# Altium PCB DS131-1.0-BpH传感器.PcbDoc
Units mm, origin at the board's own origin, x right, y up, seen from the top; angles counter-clockwise.
Board outline 41 x 64 mm, 2 copper layers (Top Layer, Bottom Layer), stack 1.671 mm thick; 30 components, 36 nets, 109 pads, 81 vias.
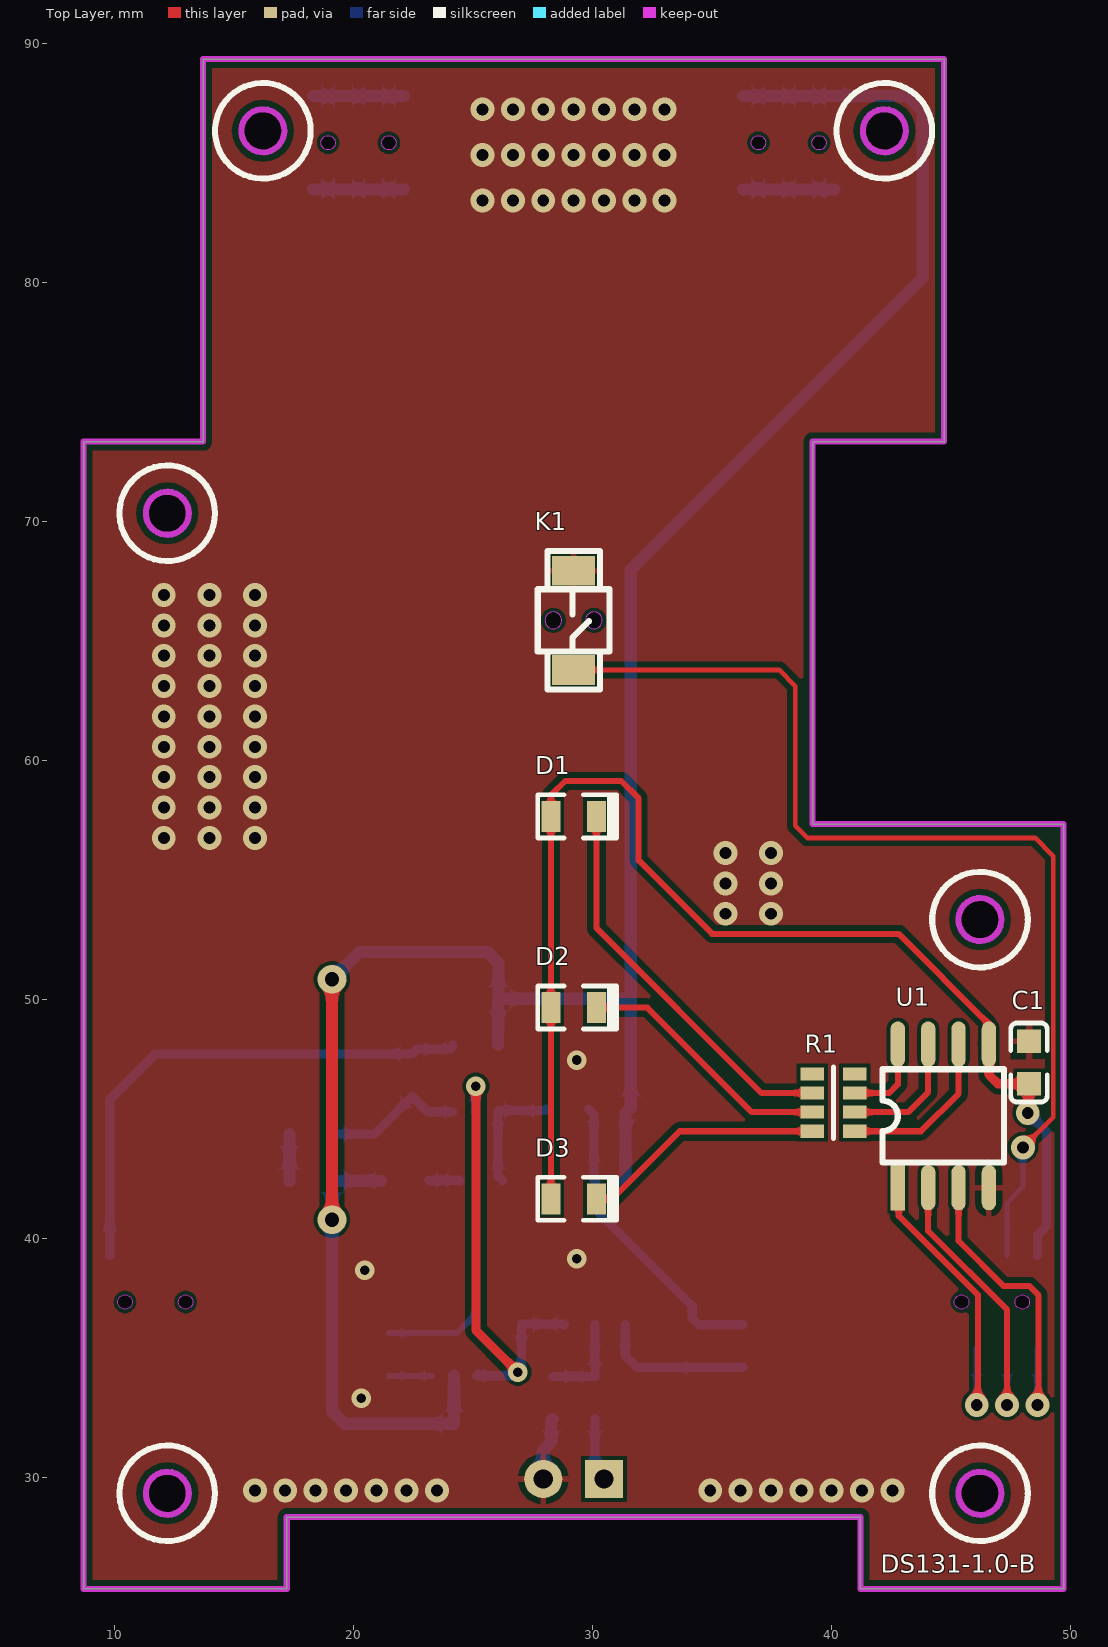
[diagram p0: Top Layer view]
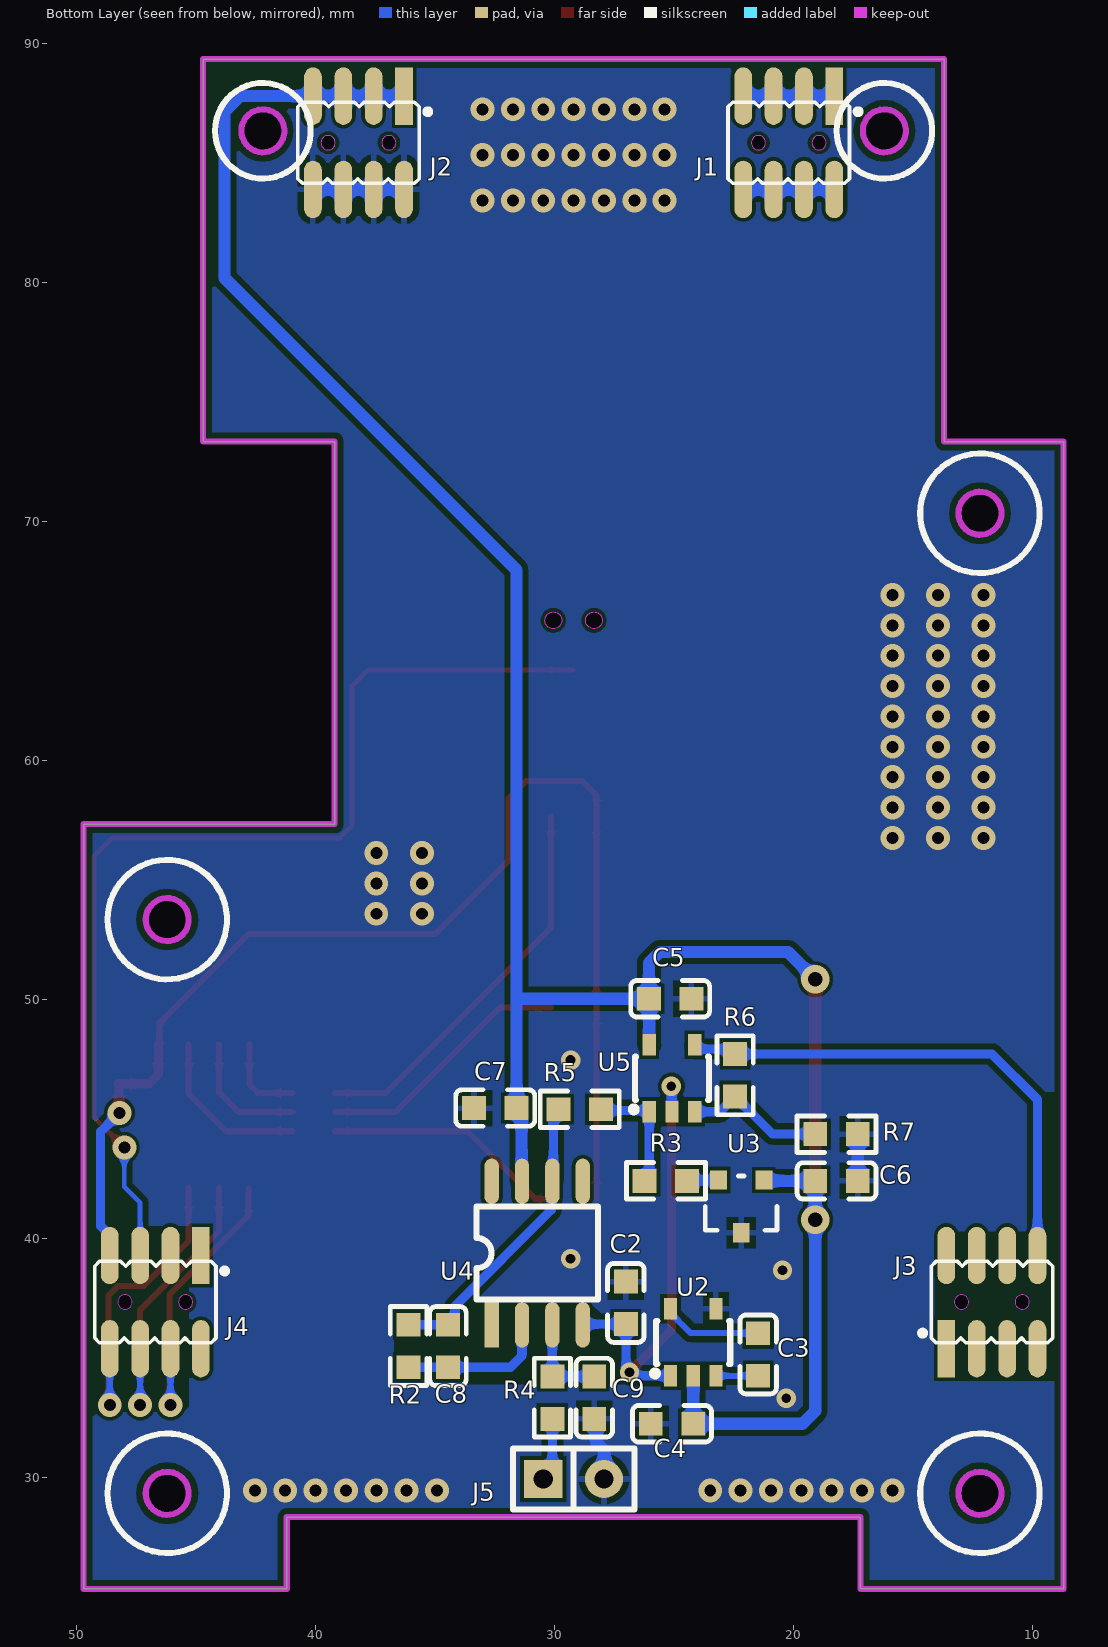
[diagram p1: Bottom Layer view, seen from below]
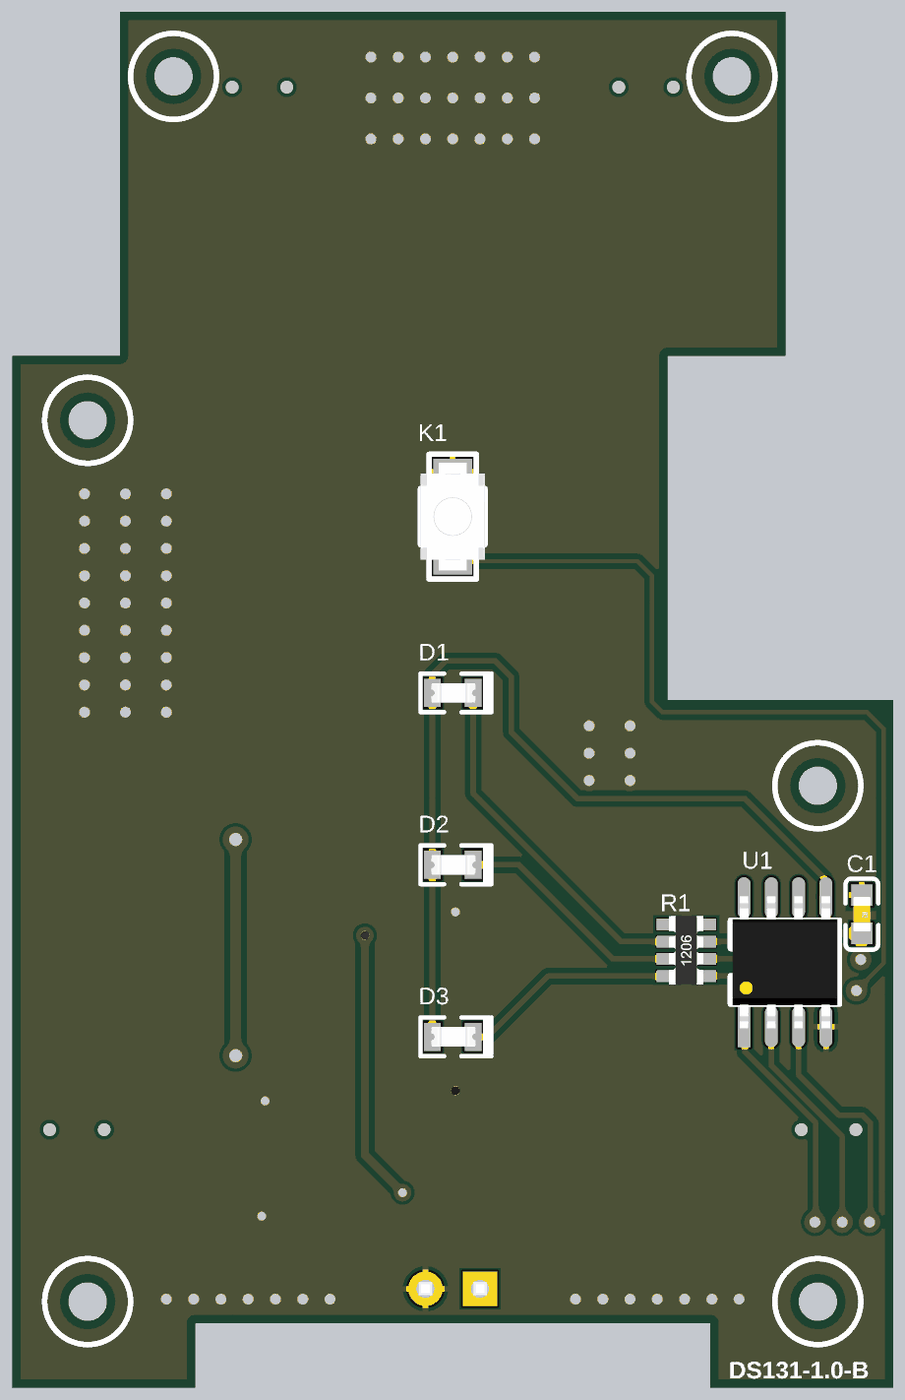
[diagram p2: 3D render of the assembled board from above, using the file's embedded part models]
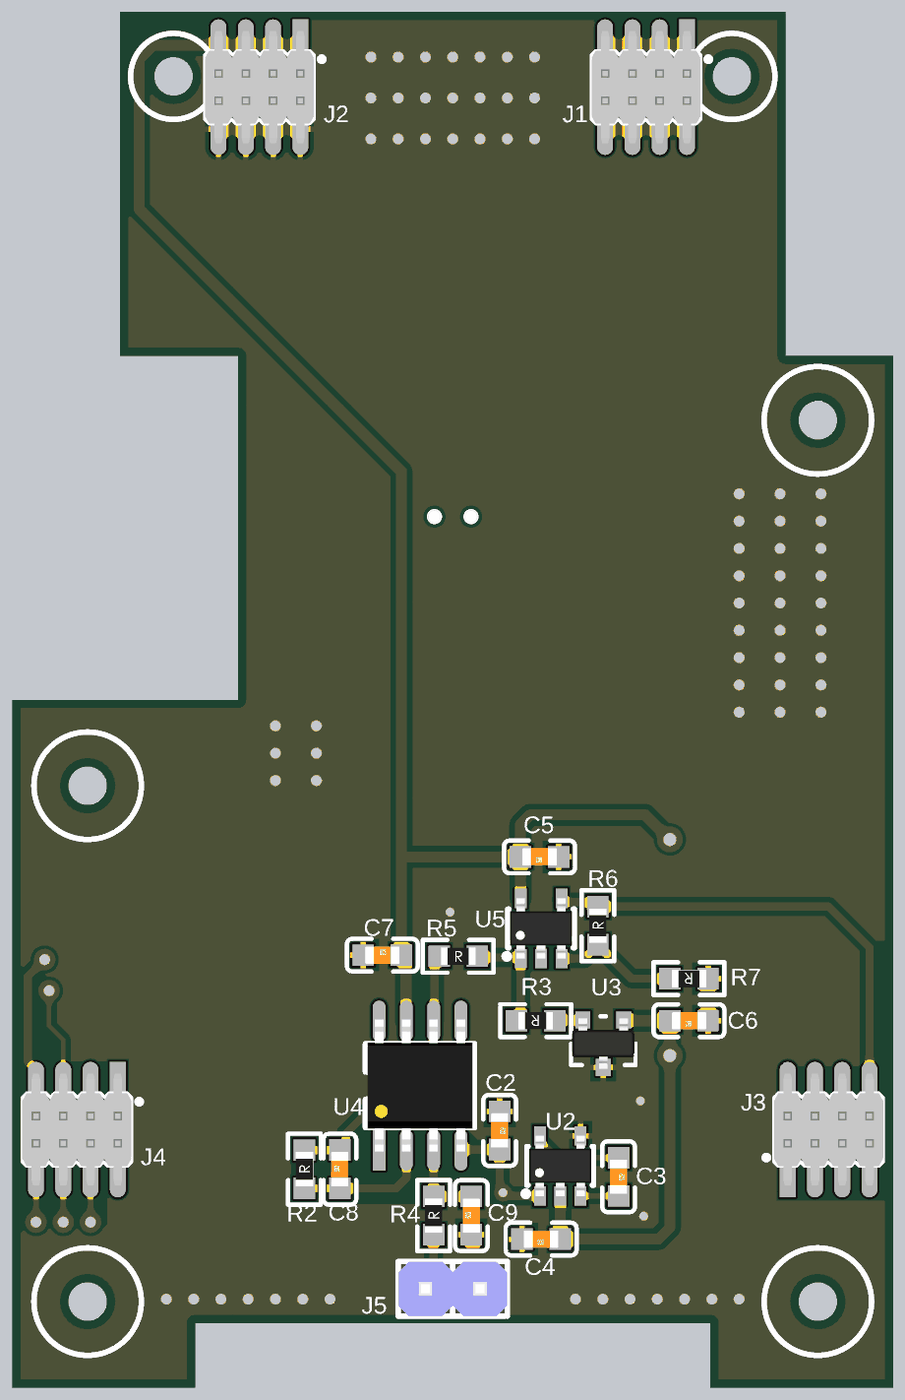
[diagram p3: 3D render of the assembled board from below, using the file's embedded part models]

## Layer stack, top to bottom
Top Solder: solder mask 0.0102, Solder Resist, Dk 3.5
Top Layer: signal copper 0.0356
Dielectric 1: dielectric 1.6, FR-4, Dk 4.8
Bottom Layer: signal copper 0.0356
Bottom Solder: solder mask 0.0102, Solder Resist, Dk 3.5

## Board outline
8.71,25.349 8.71,73.349 13.71,73.349 13.71,89.349 44.71,89.349 44.71,73.349 39.21,73.349 39.21,57.349 49.71,57.349 49.71,25.349 41.21,25.349 41.21,28.349 17.21,28.349 17.21,25.349
cut-out: 15.31,86.349 ccw(c16.21,86.349) 16.21,85.449 ccw(c16.21,86.349) 17.11,86.349 ccw(c16.21,86.349) 16.21,87.249 ccw(c16.21,86.349)
cut-out: 41.31,86.349 ccw(c42.21,86.349) 42.21,85.449 ccw(c42.21,86.349) 43.11,86.349 ccw(c42.21,86.349) 42.21,87.249 ccw(c42.21,86.349)
cut-out: 11.31,70.349 ccw(c12.21,70.349) 12.21,69.449 ccw(c12.21,70.349) 13.11,70.349 ccw(c12.21,70.349) 12.21,71.249 ccw(c12.21,70.349)
cut-out: 45.31,53.349 ccw(c46.21,53.349) 46.21,52.449 ccw(c46.21,53.349) 47.11,53.349 ccw(c46.21,53.349) 46.21,54.249 ccw(c46.21,53.349)
cut-out: 45.31,29.349 ccw(c46.21,29.349) 46.21,28.449 ccw(c46.21,29.349) 47.11,29.349 ccw(c46.21,29.349) 46.21,30.249 ccw(c46.21,29.349)
cut-out: 11.31,29.349 ccw(c12.21,29.349) 12.21,28.449 ccw(c12.21,29.349) 13.11,29.349 ccw(c12.21,29.349) 12.21,30.249 ccw(c12.21,29.349)

## Design rules (kind name [scope] priority, off if disabled: settings)
Clearance [All] p1: gap=0.152 ignorepadtopadclearanceinfootprint=TRUE except(0.254: Arc-Fill Arc-Poly Arc-Region Track-Fill Track-Poly Track-Region)
PlaneConnect [All] p1: pad.planeconnectstyle=Relief pad.reliefexpansion=0.508 pad.reliefentries=4 pad.reliefconductorwidth=0.254 pad.reliefairgap=0.254 via.planeconnectstyle=Direct via.reliefexpansion=0.508 via.reliefentries=4 via.reliefconductorwidth=0.254 via.reliefairgap=0.254
PolygonConnect [All] p1: thpad.connectstyle=Relief thpad.reliefconductorwidth=0.254 thpad.reliefentries=4 thpad.polygonreliefangle="90 Angle" thpad.airgapwidth=0.254 smdpad.connectstyle=Relief smdpad.reliefconductorwidth=0.254 smdpad.reliefentries=4 smdpad.polygonreliefangle="90 Angle" smdpad.airgapwidth=0.254 via.connectstyle=Direct via.reliefconductorwidth=0.254 via.reliefentries=4 via.polygonreliefangle="90 Angle" via.airgapwidth=0.254
RoutingVias [All] p1: holewidth=0.508 width=1.016 viastyle="Through Hole" minholewidth=0.305 minwidth=0.559 maxholewidth=0.711 maxwidth=1.524
SolderMaskExpansion [All] p1: expansion=0.102 istentingtop=FALSE
Width [All] p1: maxlimit=0.508 minlimit=0.152 preferedwidth=0.254
29 further rules are at their usual default settings.

## Classes and differential pairs
net class R2_Nets: NetC8_1 NetC8_2
net class U5_Nets: ADC0 NetR3_2 NetR6_1 VCC_5V VCC_-5V
net class U4_Nets: NetC8_1 NetC8_2 NetC9_2 NetU4_1 NetU4_5 NetU4_8 VCC_5V VCC_-5V
net class U3_Nets: GND V_REF_+1V25 VCC_5V
net class U2_Nets: GND NetC3_1 NetC3_2 VCC_5V VCC_-5V
net class U1_Nets: Dis_blue_EN Dis_green_EN Dis_red_EN GND NetR1_1 NetR1_2 NetR1_3 VCC_3V3_MCU
net class R7_Nets: GND NetR6_1
net class R6_Nets: ADC0 NetR6_1
net class R5_Nets: NetC8_2 NetR3_2
net class R4_Nets: NetC9_2 NetJ5_1
net class R3_Nets: NetR3_2 V_REF_+1V25
net class R1_Nets: LED_blue LED_green LED_red NetR1_1 NetR1_2 NetR1_3
net class K1_Nets: GND KEY_HOME
net class J5_Nets: GND NetJ5_1
net class J4_Nets: ADC1 Dis_blue_EN Dis_green_EN Dis_red_EN I2C1_SCL I2C1_SDA KEY_HOME VCC_3V3_MCU
net class J3_Nets: ADC0 DAC_OUT SPI2_CS SPI2_MISO SPI2_MOSI SPI2_SCK USART2_RXD USART2_TXD
net class J2_Nets: GND VCC_5V
net class J1_Nets: VBUS VSS
net class D3_Nets: LED_green VCC_3V3_MCU
net class D2_Nets: LED_red VCC_3V3_MCU
net class D1_Nets: LED_blue VCC_3V3_MCU
net class C9_Nets: GND NetC9_2
net class C8_Nets: NetC8_1 NetC8_2
net class C7_Nets: GND VCC_5V
net class C6_Nets: GND VCC_5V
net class C5_Nets: GND VCC_5V
net class C4_Nets: GND VCC_5V
net class C3_Nets: NetC3_1 NetC3_2
net class C2_Nets: GND VCC_-5V
net class C1_Nets: GND VCC_3V3_MCU

## Components (designator, comment, footprint, x,y, rotation, side; value= is the part's Value field where it differs from the comment)
C1 "SMDCAP00013" 0603CAP 48.26,47.371 r270 top value=100nF
C2 "MLCC 3.3uF 50V ±10％ 0603" 0603CAP 27.026,37.314 r270 bottom value=3.3uF
C3 "MLCC 3.3uF 50V ±10％ 0603" 0603CAP 21.488,35.157 r270 bottom value=3.3uF
C4 "MLCC 3.3uF 50V ±10％ 0603" 0603CAP 25.095,32.258 r0 bottom value=3.3uF
C5 "SMDCAP00013" 0603CAP 25.17,50.038 r0 bottom value=100nF
C6 "SMDCAP00013" 0603CAP 18.211,42.418 r0 bottom value=100nF
C7 "SMDCAP00013" 0603CAP 32.488,45.466 r180 bottom value=100nF
C8 "SMDCAP00015" 0603CAP 34.468,35.509 r90 bottom value=1uF
C9 "" 0603CAP 28.346,33.35 r90 bottom value=2.2nF
D1 "SMDLED00010" LED_0805 29.21,57.669 r0 top value=BLUE
D2 "SMDLED00003" LED_0805 29.21,49.669 r0 top value=RED
D3 "Chip 翠绿LED 0805" LED_0805 29.21,41.669 r0 top value=GREEN
J1 "X1321WVS-2x04J-C40D53" X1321WVS-2x04J-C40D53 20.21,85.849 r0 bottom value=2*4P
J2 "X1321WVS-2x04J-C40D53" X1321WVS-2x04J-C40D53 38.21,85.849 r0 bottom value=2*4P
J3 "X1321WVS-2x04J-C40D53" X1321WVS-2x04J-C40D53 11.71,37.349 r180 bottom value=2*4P
J4 "X1321WVS-2x04J-C40D53" X1321WVS-2x04J-C40D53 46.71,37.349 r0 bottom value=2*4P
J5 "SL000000042" SIP2 29.21,29.947 r180 bottom value=PH探头
K1 "TS-1185-B-A-A-A" KEY_TS-1185-x-A-A-A 29.21,65.869 r270 top
R1 "SMDRES05003" 0603RES_Pack4 40.081,45.695 r180 top value=510R
R2 "" 0603RES 36.119,35.509 r90 bottom value=22R
R3 "SMDRES00039" 0603RES 25.349,42.421 r0 bottom value=1.5K
R4 "Chip 4.7M 1/16W ±1％ 0603" 0603RES 30.099,33.35 r90 bottom value=4.7M
R5 "SMDRES00034" 0603RES 28.956,45.415 r180 bottom value=1K
R6 "SMDRES00039" 0603RES 22.454,46.838 r90 bottom value=1.5K
R7 "SMDRES00034" 0603RES 18.212,44.374 r0 bottom value=1K
U1 "SMDIC000018" SO-8 44.679,45.139 r90 top value=ULN2001
U2 "SGM3206" SOT23-5 24.206,35.664 r180 bottom value=丝印SL7NL
U3 "REF3012" SOT23 22.2,41.351 r0 bottom value=丝印R30C
U4 "CA3140" SO-8 30.734,39.398 r90 bottom
U5 "SMDIC000035" SOT23-5 25.095,46.711 r180 bottom value=LM321

## Footprints (in the part's own frame and the unit in brackets; to place one, negate y for a bottom-side part, rotate by r counter-clockwise, add the part's x,y. Pads: shape width x height; smd on the part's side, far side on the other; paste and mask are expansions set on the pad)
0603CAP [mm]
  rect 1x1 smd: 1(-0.889,0) 2(0.89,0)
  silkscreen extent -1.65,-0.76 1.65,0.76, body extent -0.8,-0.4 0.8,0.4, height 0.3
0603RES [mm]
  rect 1x1 smd: 1(-0.889,0) 2(0.889,0)
  silkscreen extent -1.65,-0.76 1.65,0.76, body extent -0.8,-0.41 0.8,0.41, height 0.51
0603RES_Pack4 [mm]
  rect 1x0.55 smd mask+0.05: 1(-0.889,1.2) 2(-0.889,0.4) 3(-0.889,-0.4) 4(-0.889,-1.2) 5(0.889,-1.2) 6(0.889,-0.4) 7(0.889,0.4) 8(0.889,1.2)
  silkscreen extent 0,-1.5 0,1.5, body extent -0.8,-1.6 0.8,1.6, height 0.5
KEY_TS-1185-x-A-A-A [mm]
  rect 1.25x1.8 smd: 1(-2.075,0) 2(2.075,0)
  Keep-Out Layer board cut-out: -0.35,0.85 -0.323,0.716 -0.247,0.603 -0.134,0.527 0,0.5 0,0.5 0.134,0.527 0.247,0.603 0.323,0.716 0.35,0.85 0.35,0.85 0.323,0.984 0.247,1.097 0.134,1.173 0,1.2 0,1.2 -0.134,1.173 -0.247,1.097 -0.323,0.984 -0.35,0.85
  Keep-Out Layer board cut-out: 0.35,-0.85 0.323,-0.716 0.247,-0.603 0.134,-0.527 0,-0.5 0,-0.5 -0.134,-0.527 -0.247,-0.603 -0.323,-0.716 -0.35,-0.85 -0.35,-0.85 -0.323,-0.984 -0.247,-1.097 -0.134,-1.173 0,-1.2 0,-1.2 0.134,-1.173 0.247,-1.097 0.323,-0.984 0.35,-0.85
  silkscreen extent -2.9,-1.5 2.9,1.5, body extent -2.5,-1.5 2.5,1.5, height 2
LED_0805 [mm]
  rect 0.8x1.3 smd: 1(-0.95,0) 2(0.95,0)
  silkscreen extent -1.5,-0.9 1.8,0.9, body extent -1,-0.45 1.06,0.45, height 0.85
SIP2 [mm]
  rect 1.6x1.6 hole 0.813: 1(-1.27,0)
  round 1.6 hole 0.813: 2(1.27,0)
  silkscreen extent -2.54,-1.27 2.54,1.27, body extent -2.54,-1.27 2.54,1.27, height 8.64
SO-8 [mm]
  rect 1.9x0.6 smd: 1(-3,1.905)
  oval 1.9x0.6 smd: 2(-3,0.635) 3(-3,-0.635) 4(-3,-1.905) 5(3,-1.905) 6(3,-0.635) 7(3,0.635) 8(3,1.905)
  silkscreen extent -1.95,-2.54 1.95,2.54, body extent -3.07,-2.44 3.07,2.44, height 1.77
SOT23 [mm]
  rect 0.7x0.8 smd: 1(-0.95,-1.1) 2(0.95,-1.1) 3(0,1.1)
  silkscreen extent -1.5,-1.27 1.5,1, body extent -1.46,-1.17 1.46,1.17, height 1
SOT23-5 [mm] "SOT-23/SC-74A; 5 Leads; Body 3.1 x 3 mm, inc. leads (LxW max)"
  rect 0.55x0.9 smd: 1(-0.95,-1.4) 2(0,-1.4) 3(0.95,-1.4) 4(0.95,1.4) 5(-0.95,1.4)
  silkscreen extent -1.7,-1.4 1.55,0.9, body extent -1.45,-1.4 1.45,1.4, height 1.45
X1321WVS-2x04J-C40D53 [mm]
  rect 0.74x2.4 smd: 1(-1.905,-1.95)
  oval 0.74x2.4 smd: 2(-1.905,1.95) 3(-0.635,-1.95) 4(-0.635,1.95) 5(0.635,-1.95) 6(0.635,1.95) 7(1.905,-1.95) 8(1.905,1.95)
  Keep-Out Layer board cut-out: 1.57,0 1.547,0.115 1.482,0.212 1.385,0.277 1.27,0.3 1.27,0.3 1.155,0.277 1.058,0.212 0.993,0.115 0.97,0 0.97,0 0.993,-0.115 1.058,-0.212 1.155,-0.277 1.27,-0.3 1.27,-0.3 1.385,-0.277 1.482,-0.212 1.547,-0.115 1.57,0
  Keep-Out Layer board cut-out: -1.57,0 -1.547,-0.115 -1.482,-0.212 -1.385,-0.277 -1.27,-0.3 -1.27,-0.3 -1.155,-0.277 -1.058,-0.212 -0.993,-0.115 -0.97,0 -0.97,0 -0.993,0.115 -1.058,0.212 -1.155,0.277 -1.27,0.3 -1.27,0.3 -1.385,0.277 -1.482,0.212 -1.547,0.115 -1.57,0
  silkscreen extent -3,-1.7 2.54,1.7, body extent -2.54,-2.6 2.54,2.6, height 5.5

## Part data
C1 C5 C6 C7: library part "MLCC 100nF 50V ±10％ 0603", "贴片电容"
C2 C3 C4: "贴片电容"
C8: library part "MLCC 1uF 50V ±10％ 0603", "贴片电容"
C9: library part "MLCC 2.2nF 50V ±10％ 0603", "贴片电容"
D1: library part "Chip 蓝色LED 0805", "贴片LED"
D2: library part "Chip 红色LED 0805", "贴片LED"
D3: "贴片LED"
J1 J2 J3 J4: "双排针2x4P 立贴 1.27mm"
J5: library part "DIP2 单排直针 1*40P 间距2.54mm 针长11mm 铜", "单排直针"
K1: "轻触开关"
R1: library part "Chip R*4 510R 1/16W ±5％ 0603", "贴片排阻"
R2: library part "Chip 22R 1/16W ±1％ 0603", "贴片电阻"
R3 R6: library part "Chip 1.5K 1/16W ±1％ 0603", "贴片电阻"
R4: "贴片电阻"
R5 R7: library part "Chip 1K 1/16W ±1％ 0603", "贴片电阻"
U1: library part "ULN2001 SOP-8", "电机驱动芯片"
U2: "电荷泵芯片"
U3: library part REF3025
U4: "RENESAS(瑞萨) / CA3140AMZ96 / SOIC-8"
U5: library part "LM321 SOT23-5", "运放芯片"

## Via types
v1: diameter 1, hole 0.5, Top Layer to Bottom Layer, tented both sides, 73 vias
v2: diameter 0.813, hole 0.406, Top Layer to Bottom Layer, tented both sides, 6 vias
v3: diameter 1.2, hole 0.6, Top Layer to Bottom Layer, tented both sides, 2 vias

## Nets (pads, with @x,y where several pads share a name; then routed paths per layer and width w, separated by ;. In a path a pad name is that pad's centre, name@x,y a point inside that pad or via, vN(x,y) a via of type N, cw(c..) or ccw(c..) an arc to the next point about the centre after c; other vN are vias at no path point)
ADC0: J3.8 R6.2 U5.4 | length 21.9
  Bottom Layer w0.381: J3.8 9.805,45.822 11.709,47.727 R6.2 22.657,47.93 24.061,47.93 24.145,48.014 U5.4
ADC1: J4.2
DAC_OUT: J3.6
Dis_blue_EN: J4.4 U1.1 | length 12.8
  Top Layer w0.254: U1.1@42.813,42.099 42.813,40.956 46.121,37.648 46.121,33.092 v1(46.075,33.046)
  Bottom Layer w0.254: v1(46.075,33.046) J4.4
Dis_green_EN: J4.8 U1.3 | length 13.5
  Top Layer w0.254: U1.3 45.314,39.903 47.187,38.03 48.262,38.03 48.661,37.631 48.661,33.092 v1(48.615,33.046)
  Bottom Layer w0.254: v1(48.615,33.046) J4.8
Dis_red_EN: J4.6 U1.2 | length 12.8
  Top Layer w0.254: U1.2 44.044,40.322 47.345,37.021 v1(47.345,33.046)
  Bottom Layer w0.254: v1(47.345,33.046) J4.6
GND: C1.1 C2.1 C4.2 C5.1 C6.1 C7.1 C9.1 J2.2 J2.4 J2.6 J2.8 J5.2 K1.1 R7.1 U1.4 U2.4 U3.3 | length 8.5
  Bottom Layer w0.508: C6.1 C6.1 R7.1 ; J5.2 27.927,29.96 27.927,31.153 28.271,31.497 28.271,32.386 C9.1 ; J2.2 J2.4 J2.6 J2.8
  other v1: 15.875,29.464 17.145,29.464 18.415,29.464 19.685,29.464 20.955,29.464 22.225,29.464 23.495,29.464 34.925,29.464 36.195,29.464 37.465,29.464 38.735,29.464 40.005,29.464 41.275,29.464 42.545,29.464 35.56,53.594 37.465,53.594 35.56,54.864 37.465,54.864 35.56,56.134 37.465,56.134 12.065,56.769 13.97,56.769 15.875,56.769 12.065,58.039 13.97,58.039 15.875,58.039 12.065,59.309 13.97,59.309 15.875,59.309 12.065,60.579 13.97,60.579 15.875,60.579 12.065,61.849 13.97,61.849 15.875,61.849 12.065,63.119 13.97,63.119 15.875,63.119 12.065,64.389 13.97,64.389 15.875,64.389 12.065,65.659 13.97,65.659 15.875,65.659 12.065,66.929 13.97,66.929 15.875,66.929 25.4,83.439 26.67,83.439 27.94,83.439 29.21,83.439 30.48,83.439 31.75,83.439 33.02,83.439 25.4,85.344 26.67,85.344 27.94,85.344 29.21,85.344 30.48,85.344 31.75,85.344 33.02,85.344 25.4,87.249 26.67,87.249 27.94,87.249 29.21,87.249 30.48,87.249 31.75,87.249 33.02,87.249
  other v2: 20.32,33.325 20.472,38.684 29.337,39.167 29.337,47.473
I2C1_SCL: J4.1
I2C1_SDA: J4.3
KEY_HOME: J4.5 K1.2 | length 44.2
  Top Layer w0.2: K1.2 37.806,63.794 38.481,63.119 38.481,57.277 38.989,56.769 48.514,56.769 49.276,56.007 49.276,45.085 v1(48.006,43.815)
  Bottom Layer w0.2: J4.5 47.345,41.503 48.006,42.164 v1(48.006,43.815)
LED_blue: D1.2 R1.6 | length 16.6
  Top Layer w0.254: D1.2 30.16,53 37.065,46.095 R1.6
LED_green: D3.2 R1.8 | length 10.2
  Top Layer w0.254: D3.2 30.823,41.669 33.649,44.495 R1.8
LED_red: D2.2 R1.7 | length 10.8
  Top Layer w0.254: D2.2 32.297,49.669 36.671,45.295 R1.7
NetC3_1: C3.1 U2.5 | length 4.2
  Bottom Layer w0.254: C3.1 24.313,36.046 25.156,36.889 U2.5
NetC3_2: C3.2 U2.3 | length 1.8
  Bottom Layer w0.254: C3.2 21.491,34.264 U2.3
NetC8_1: C8.1 R2.1 U4.2 | length 6.4
  Bottom Layer w0.381: U4.2 31.369,35.103 31.852,34.62 C8.1 R2.1@36.297,34.62
NetC8_2: C8.2 R2.2 R5.1 U4.6 | length 12.8
  Bottom Layer w0.381: R5.1 30.057,45.203 30.057,42.44 30.141,42.356 30.141,41.208 34.173,37.176 34.173,36.694 C8.2 36.296,36.399 R2.2@36.297,36.398
NetC9_2: C9.2 R4.2 U4.3 | length 3.9
  Bottom Layer w0.381: C9.2 R4.2 U4.3
NetJ5_1: J5.1 R4.1 | length 2.7
  Bottom Layer w0.381: R4.1 30.099,30.328 J5.1
NetR1_1: R1.1 U1.6 | length 7.1
  Top Layer w0.254: R1.1 43.739,44.495 45.314,46.069 U1.6
NetR1_2: R1.2 U1.7 | length 5.4
  Top Layer w0.254: R1.2 43.212,45.295 44.044,46.126 U1.7
NetR1_3: R1.3 U1.8 | length 3.6
  Top Layer w0.254: R1.3 42.412,46.095 42.774,46.457 U1.8
NetR3_2: R3.2 R5.2 U5.1 | length 5
  Bottom Layer w0.381: R3.2 26.045,42.614 U5.1 26.098,45.363 28.015,45.363 R5.2
NetR6_1: R6.1 R7.2 U5.3 | length 6
  Bottom Layer w0.381: R7.2 20.879,44.374 R6.1 23.092,45.311 U5.3
SPI2_CS: J3.4
SPI2_MISO: J3.1
SPI2_MOSI: J3.3
SPI2_SCK: J3.2
USART2_RXD: J3.5
USART2_TXD: J3.7
V_REF_+1V25: R3.1 U3.2 | length 1.3
  Bottom Layer w0.381: U3.2 23.18,42.421 U3.2@23.444,42.421 ; U3.2@23.444,42.469 23.468,42.445 24.436,42.445 R3.1
VBUS: J1.2 J1.4 J1.6 J1.8 | length 3.8
  Bottom Layer w0.508: J1.2 J1.4 J1.6 J1.8
VCC_3V3_MCU: C1.2 D1.1 D2.1 D3.1 J4.7 U1.5 | length 52.8
  Top Layer w0.254: D3.1 D1.1 28.26,58.547 28.87,59.157 31.191,59.157 31.928,58.42 31.928,55.829 35.006,52.751 42.804,52.751 46.542,49.013 U1.5@46.542,48.181
  Top Layer w0.381: U1.5@46.542,48.181 U1.5 46.584,46.863 46.966,46.481 C1.2 48.235,46.456 48.235,45.288 v1(48.209,45.263)
  Bottom Layer w0.381: v1(48.209,45.263) 48.997,44.475 48.997,40.532 48.615,40.15 J4.7
VCC_5V: C4.1 C5.2 C6.2 C7.2 J2.1 J2.3 J2.5 J2.7 U2.2 U3.1 U4.7 U5.5 | length 103.4
  Top Layer w0.508: v3(19.101,40.792) v3(19.101,50.851)
  Bottom Layer w0.508: v3(19.101,50.851) 20.244,51.994 25.603,51.994 26.06,51.537 C5.2 ; U3.1@21.158,42.418 C6.2 v3(19.101,40.792) 19.101,32.791 19.634,32.258 C4.1 U2.2 ; U5.5 26.053,48.118 26.053,50.03 C5.2 ; U4.7 31.387,42.416 31.387,45.255 C7.2 31.598,50.063 ; J2.1 J2.3 J2.5 J2.7 43.163,87.799 43.815,87.147 43.815,80.188 31.598,67.97 31.598,50.063 ; C5.2 31.572,50.038 31.598,50.063
VCC_-5V: C2.2 U2.1 U4.4 U5.2 | length 19.6
  Top Layer w0.381: v2(25.121,46.38) 25.121,36.169 v2(26.873,34.417)
  Bottom Layer w0.381: U5.2 25.108,45.323 25.108,46.368 v2(25.121,46.38) ; U2.1@25.241,34.349 U2.1 26.721,34.264 v2(26.873,34.417) 27.026,34.569 C2.2 28.804,36.424 U4.4
VSS: J1.1 J1.3 J1.5 J1.7 | length 3.8
  Bottom Layer w0.508: J1.1 J1.3 J1.5 J1.7
pads on no net: R1.4 R1.5 U4.1 U4.5 U4.8

## Polygon pours and split planes (outlines as drawn)
GND on Top Layer "GND_L01_P002" (solid, remove dead copper, pour order 2): 8.71,25.349 8.71,73.349 13.71,73.349 13.71,89.349 44.71,89.349 44.71,73.349 39.21,73.349 39.21,57.349 49.71,57.349 49.71,25.349 41.21,25.349 41.21,28.349 17.21,28.349 17.21,25.349
GND on Bottom Layer "GND_L02_P001" (solid, remove dead copper, pour order 1): 8.71,25.349 8.71,73.349 13.71,73.349 13.71,89.349 44.71,89.349 44.71,73.349 39.21,73.349 39.21,57.349 49.71,57.349 49.71,25.349 41.21,25.349 41.21,28.349 17.21,28.349 17.21,25.349

## Keep-outs
Keep-Out Layer:
  circle w0.254: c12.21,29.349 r0.9
  circle w0.254: c46.21,29.349 r0.9
  circle w0.254: c12.21,70.349 r0.9
  circle w0.254: c46.21,53.349 r0.9
  circle w0.254: c42.21,86.349 r0.9
  circle w0.254: c16.21,86.349 r0.9
  lines w0.254: 8.71,25.349 17.21,25.349 17.21,28.349 41.21,28.349 41.21,25.349 49.71,25.349 49.71,57.349 39.21,57.349 39.21,73.349 44.71,73.349 44.71,89.349 13.71,89.349 13.71,73.349 8.71,73.349 8.71,25.349

## Other copper
Bottom Layer:
  pour cut-out: 9.485,46.143 9.102,46.143 9.098,46.147 9.098,40.31 9.308,40.31 9.352,40.353 9.352,40.412
  pour cut-out: 14.107,40.333 14.084,40.31 9.093,40.31 9.093,34.087 9.133,34.047 14.137,34.047
  pour cut-out: 45.297,40.047 45.297,40.538 45.954,40.538 49.225,40.538 49.225,32.745 45.516,32.745 45.297,32.964
  pour cut-out: 30.945,46.118 30.894,46.068 30.497,46.068 30.497,41.492 30.594,41.395 30.621,41.422 31.043,41.422
  pour cut-out: 36.728,35.164 36.728,37.052 33.656,37.052 33.218,37.489 33.203,37.474 28.652,37.474 26.822,35.644 26.822,33.884 33.731,33.884

## Silkscreen, mask and mechanical layers (free items; w line width, h text height)
Top Overlay:
  circle w0.254: c16.21,86.349 r2
  circle w0.254: c42.21,86.349 r2
  circle w0.254: c12.21,29.349 r2
  circle w0.254: c46.21,29.349 r2
  circle w0.254: c46.21,53.349 r2
  circle w0.254: c12.21,70.349 r2
  text "DS131-1.0-B" at 42.062,25.778 h1.27
Bottom Overlay:
  circle w0.254: c16.21,86.349 r2
  circle w0.254: c42.21,86.349 r2
  circle w0.254: c12.21,29.349 r2.5
  circle w0.254: c46.21,29.349 r2.5
  circle w0.254: c46.21,53.349 r2.5
  circle w0.254: c12.21,70.349 r2.5
Mechanical 1:
  circle w0.254: c16.21,86.349 r0.9
  circle w0.254: c42.21,86.349 r0.9
  circle w0.254: c46.21,53.349 r0.9
  circle w0.254: c12.21,70.349 r0.9
  circle w0.254: c46.21,29.349 r0.9
  circle w0.254: c12.21,29.349 r0.9
  lines w0.254: 8.71,25.349 8.71,73.349 13.71,73.349 13.71,89.349 44.71,89.349 44.71,73.349 39.21,73.349 39.21,57.349 49.71,57.349 49.71,25.349 41.21,25.349 41.21,28.349 17.21,28.349 17.21,25.349 8.71,25.349
Mechanical 15:
  circle w0.254: c29.21,41.669 r0.6
  circle w0.254: c29.21,49.669 r0.6
  circle w0.254: c29.21,57.669 r0.6
  circle w0.254: c29.21,65.869 r1.5